# EAGLE board 32a4u (EAGLE 6.3)
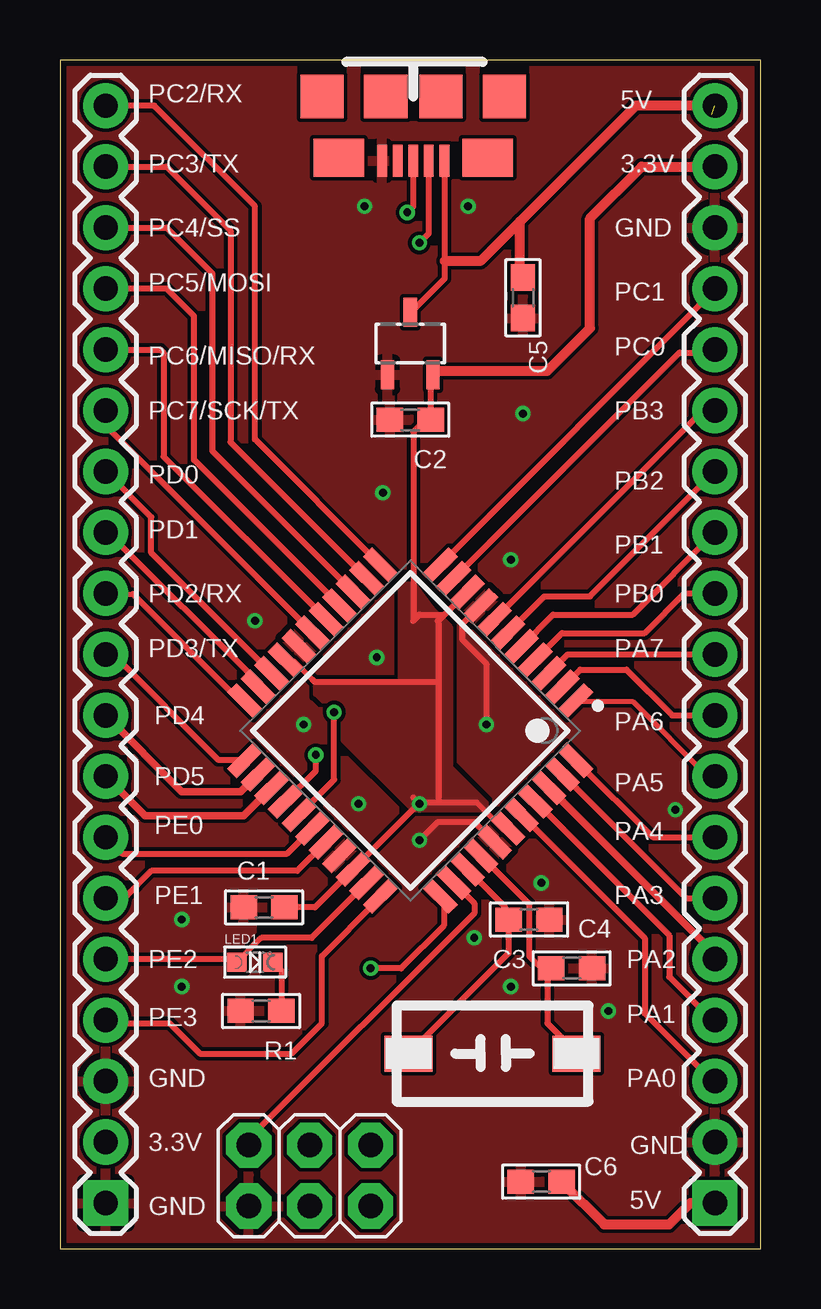
[diagram p0: board, top side]
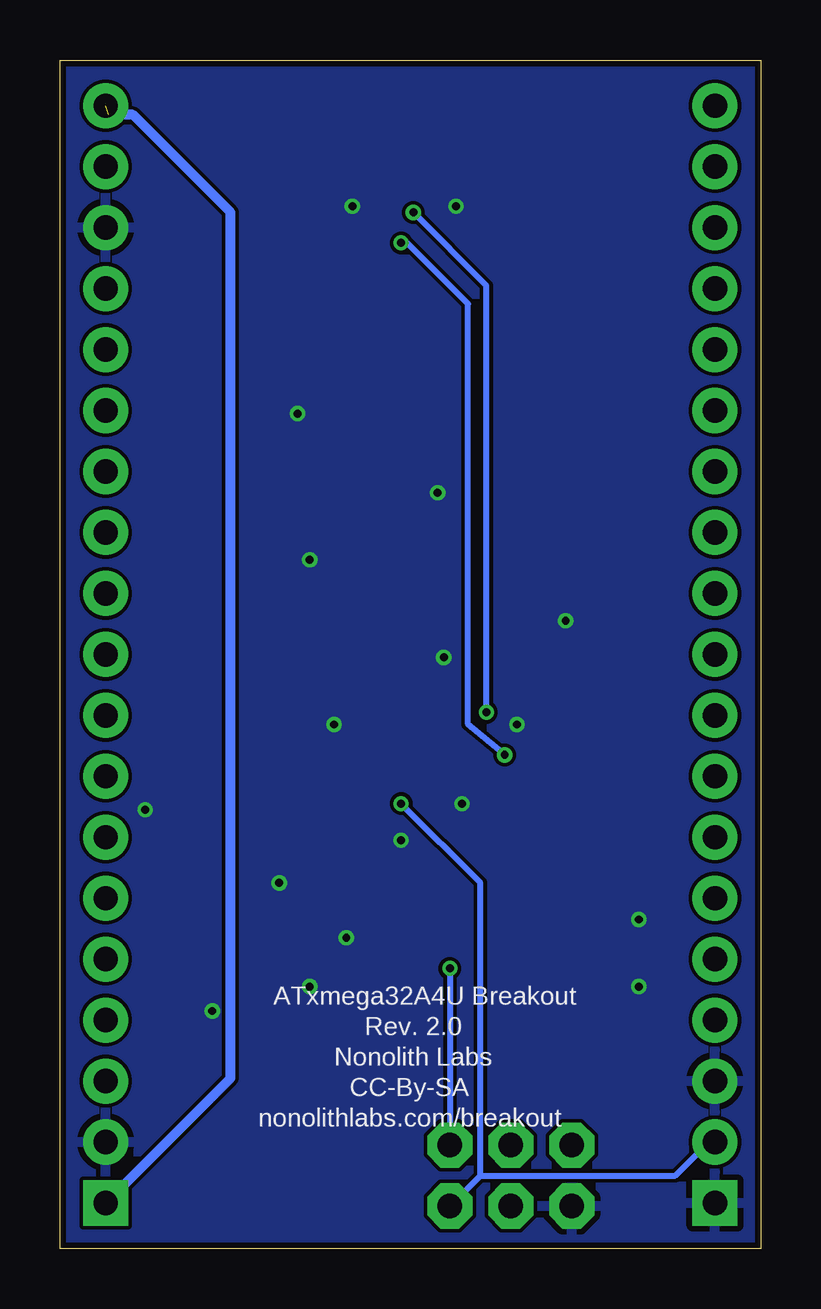
[diagram p1: board, bottom side, seen from below]

Size 29.21 x 49.53 mm. Coordinates in mm from the lower left corner, seen from the top.
Outline: 0,0 29.21,0 29.21,49.53 0,49.53 0,0
Copper layers (1*16): Top 0.035mm / dielectric 1.5mm / Bottom 0.035mm
Design rules "default": minimum track width 6mil, minimum drill 12mil, track to track 6mil, track to pad 6mil, pad to pad 6mil, via to via 6mil, smd to smd 0mil, copper to edge 10mil, drill to drill 10mil, minimum pad ring 10mil, minimum via ring 6mil, stop-mask expansion 20mil, vias tented up to drill 100mil, thermal gap 10mil
Net classes: 0 default: width 0.203 mm, clearance 0.152 mm

## Footprints (pad centres in the part's own frame; a part is rotated, then mirrored left to right if it is on the bottom)
TQFP-44 = smd 1.55 x 0.55: 1 -5.75,4; 2 -5.75,3.2; 3 -5.75,2.4; 4 -5.75,1.6; 5 -5.75,0.8; 6 -5.75,0; 7 -5.75,-0.8; 8 -5.75,-1.6; 9 -5.75,-2.4; 10 -5.75,-3.2; 11 -5.75,-4; 23 5.75,-4; 24 5.75,-3.2; 25 5.75,-2.4; 26 5.75,-1.6; 27 5.75,-0.8; 28 5.75,0; 29 5.75,0.8; 30 5.75,1.6; 31 5.75,2.4; 32 5.75,3.2; 33 5.75,4 | smd 0.55 x 1.55: 12 -4,-5.75; 13 -3.2,-5.75; 14 -2.4,-5.75; 15 -1.6,-5.75; 16 -0.8,-5.75; 17 0,-5.75; 18 0.8,-5.75; 19 1.6,-5.75; 20 2.4,-5.75; 21 3.2,-5.75; 22 4,-5.75; 34 4,5.75; 35 3.2,5.75; 36 2.4,5.75; 37 1.6,5.75; 38 0.8,5.75; 39 0,5.75; 40 -0.8,5.75; 41 -1.6,5.75; 42 -2.4,5.75; 43 -3.2,5.75; 44 -4,5.75
0603 = smd 1.1 x 1: 1 -0.85,0; 2 0.85,0
USB-MICROB = smd 0.4 x 1.35: P1 -1.3,2.675; P2 -0.65,2.675; P3 0,2.675; P4 0.65,2.675; P5 1.3,2.675 | smd 1.8 x 1.8: PAD-LB -1.15,0; PAD-LLB -3.8,0; PAD-RB 1.15,0; PAD-RRB 3.8,0 | smd 2.1 x 1.6: PAD-LT -3.1,2.55; PAD-RT 3.1,2.55
2X03 = drill 1.016 pad 1.88 octagon: 1 -2.54,-1.27; 2 -2.54,1.27; 3 0,-1.27; 4 0,1.27; 5 2.54,-1.27; 6 2.54,1.27
CHIPLED_0603 = smd 0.8 x 0.8: A 0,-0.75; C 0,0.75
SOT23-3 = smd 0.55 x 1.2: GND 0.95,1.3; VIN 0,-1.3; VOUT -0.95,1.3
1X19 = drill 1.016 pad 1.88 square: 1 0,0 | drill 1.016 pad 1.88: 2 2.54,0; 3 5.08,0; 4 7.62,0; 5 10.16,0; 6 12.7,0; 7 15.24,0; 8 17.78,0; 9 20.32,0; 10 22.86,0; 11 25.4,0; 12 27.94,0; 13 30.48,0; 14 33.02,0; 15 35.56,0; 16 38.1,0; 17 40.64,0; 18 43.18,0; 19 45.72,0
NX8045GB = smd 2 x 1.5: P$1 -3.5,0; P$2 3.5,0

## Placement (x,y rotation side)
ATXMEGA32A4U  [TQFP-44]  14.61,21.59 225 top
C1  [0603]  8.51,14.22 180 top
C2  [0603]  14.61,34.54 180 top
C3  [0603]  19.56,13.72 0 top
C4  [0603]  21.34,11.68 0 top
C5  [0603]  19.3,39.62 270 top
C6  [0603]  20.07,2.79 0 top
CN1  [USB-MICROB]  14.73,48.01 180 top
JP1  [2X03]  10.41,3.05 180 top
LED1  [CHIPLED_0603]  8.13,11.94 270 top
R1  [0603]  8.38,9.91 180 top
U$2  MCP1700  [SOT23-3]  14.61,37.72 180 top
U$3  M19  [1X19]  27.3,1.9 90 top
U$4  M19  [1X19]  1.91,1.9 90 top
Y1  [NX8045GB]  18.03,8.13 180 top

## Library data of the parts
ATXMEGA32A4U C1-C6 CN1 JP1 R1 U$2 Y1 = nonolith
LED1 = microbuilder
U$3 U$4 = SparkFun

## Nets
GND: ATXMEGA32A4U.8 ATXMEGA32A4U.18 ATXMEGA32A4U.30 ATXMEGA32A4U.38 C1.2 C2.2 C3.2 C4.2 C5.2 C6.1 CN1.P5 JP1.6 R1.2 U$2.GND U$3.2 U$3.17 U$4.1 U$4.3
N$1: LED1.C R1.1
PA0: ATXMEGA32A4U.40 U$3.3
PA1: ATXMEGA32A4U.41 U$3.4
PA2: ATXMEGA32A4U.42 U$3.5
PA3: ATXMEGA32A4U.43 U$3.6
PA4: ATXMEGA32A4U.44 U$3.7
PA5: ATXMEGA32A4U.1 U$3.8
PA6: ATXMEGA32A4U.2 U$3.9
PA7: ATXMEGA32A4U.3 U$3.10
PB0: ATXMEGA32A4U.4 U$3.11
PB1: ATXMEGA32A4U.5 U$3.12
PB2: ATXMEGA32A4U.6 U$3.13
PB3: ATXMEGA32A4U.7 U$3.14
PC0: ATXMEGA32A4U.10 U$3.15
PC1: ATXMEGA32A4U.11 U$3.16
PC2: ATXMEGA32A4U.12 U$4.19
PC3: ATXMEGA32A4U.13 U$4.18
PC4: ATXMEGA32A4U.14 U$4.17
PC5: ATXMEGA32A4U.15 U$4.16
PC6: ATXMEGA32A4U.16 U$4.15
PC7: ATXMEGA32A4U.17 U$4.14
PD0: ATXMEGA32A4U.20 U$4.13
PD1: ATXMEGA32A4U.21 U$4.12
PD2: ATXMEGA32A4U.22 U$4.11
PD3: ATXMEGA32A4U.23 U$4.10
PD4: ATXMEGA32A4U.24 U$4.9
PD5: ATXMEGA32A4U.25 U$4.8
PDI-CLK: ATXMEGA32A4U.35 JP1.5
PDI-DATA: ATXMEGA32A4U.34 JP1.1
PE0: ATXMEGA32A4U.28 U$4.7
PE1: ATXMEGA32A4U.29 U$4.6
PE2: ATXMEGA32A4U.32 LED1.A U$4.5
PE3: ATXMEGA32A4U.33 U$4.4
PR0: ATXMEGA32A4U.36 C3.1 Y1.P$2
PR1: ATXMEGA32A4U.37 C4.1 Y1.P$1
USB+: ATXMEGA32A4U.27 CN1.P3
USB-: ATXMEGA32A4U.26 CN1.P2
VCC: ATXMEGA32A4U.9 ATXMEGA32A4U.19 ATXMEGA32A4U.31 ATXMEGA32A4U.39 C1.1 C2.1 JP1.2 U$2.VOUT U$3.18 U$4.2
VUSB: C5.1 C6.2 CN1.P1 U$2.VIN U$3.1 U$3.19

## Tracks (layer width: path | path; a pad name or v marks a point on that pad's centre or on a via)
GND  (via drill 0.33)
  Top 0.254: ATXMEGA32A4U.8 16.76,26.01 16.76,25.4 17.78,24.38 v17.78,21.84 | 18.03,17.02 17.27,17.78 15.75,17.78 v14.99,17.02
  other vias: 22.86,9.91 20.07,15.24 12.45,18.54 19.3,34.8 12.7,43.43 8.13,26.16 10.16,21.84 5.08,10.92 17.02,43.43 17.27,12.95 18.8,10.92 25.65,18.29 18.8,28.7 13.21,24.64 13.46,31.5 5.08,13.72
  pour Bottom: -3.05,51.56 -3.05,-1.4 34.29,-1.4 34.29,52.2
  pour Top (rank 5): 35.94,53.47 -4.95,53.47 -4.95,-0.64 35.05,-1.91 35.05,-1.52 35.31,7.37
N$1
  Top 0.254: LED1.C 9.23,11.58 R1.1
PA0
  Top 0.203: 27.18,7.01 27.28,7.01 U$3.3 | 19.25,18.09 ATXMEGA32A4U.40
  Top 0.254: 27.18,7.01 24.38,9.8 24.38,12.94 ATXMEGA32A4U.40
PA1
  Top 0.203: 27.18,9.55 27.28,9.55 U$3.4 | ATXMEGA32A4U.41 19.81,18.64
  Top 0.254: 27.18,9.55 25.4,11.33 25.4,13.06 ATXMEGA32A4U.41
PA2
  Top 0.305: ATXMEGA32A4U.42 27.3,12.28 U$3.5
PA3
  Top 0.203: 27.28,14.63 U$3.6
  Top 0.254: ATXMEGA32A4U.43 26.12,14.61 U$3.6
PA4
  Top 0.203: ATXMEGA32A4U.44 21.54,20.32
  Top 0.254: 21.54,20.32 24.71,17.14 U$3.7
PA5
  Top 0.203: ATXMEGA32A4U.1 21.54,22.81 23.88,22.81 26.98,19.71 27.28,19.71 U$3.8
PA6
  Top 0.203: ATXMEGA32A4U.2 20.98,23.42
  Top 0.254: 20.98,23.42 21.69,24.13 23.62,24.13 25.53,22.23 U$3.9
PA7
  Top 0.254: ATXMEGA32A4U.3 21.17,24.77 U$3.10
PB0
  Top 0.254: ATXMEGA32A4U.4 20.93,25.65 24.38,25.65 26.04,27.3 U$3.11
PB1
  Top 0.254: ATXMEGA32A4U.5 20.56,26.42 23.88,26.42 U$3.12
PB2
  Top 0.254: ATXMEGA32A4U.6 20.19,27.18 22.1,27.18 U$3.13
PB3
  Top 0.254: ATXMEGA32A4U.7 26.81,34.92 U$3.14
PC0
  Top 0.254: ATXMEGA32A4U.10 25.83,37.34 27.43,37.34 U$3.15
PC1
  Top 0.254: ATXMEGA32A4U.11 27.3,39.95 U$3.16
PC2
  Top 0.254: ATXMEGA32A4U.12 8.13,33.72 8.13,43.43 3.94,47.62 U$4.19
PC3
  Top 0.254: U$4.18 4.45,45.08 7.11,42.42 7.11,33.61 ATXMEGA32A4U.13
PC4
  Top 0.254: U$4.17 4.45,42.54 6.35,40.64 6.35,33.24 ATXMEGA32A4U.14
PC5
  Top 0.254: ATXMEGA32A4U.15 5.59,32.87 5.59,38.86 4.45,40 U$4.16
PC6
  Top 0.254: U$4.15 4.19,37.46 4.32,37.34 4.32,33.01 ATXMEGA32A4U.16
PC7
  Top 0.254: ATXMEGA32A4U.17 1.91,34.29 U$4.14
PD0
  Top 0.254: ATXMEGA32A4U.20 3.81,28.99 3.81,30.48 U$4.13
PD1
  Top 0.203: 8.23,23.62 8.23,23.42 ATXMEGA32A4U.21 | 2.03,29.82 1.93,29.82 U$4.12
  Top 0.254: 2.03,29.82 8.23,23.62
PD2
  Top 0.203: 7.47,22.86 7.67,22.86 ATXMEGA32A4U.22 | 3.05,27.28 1.93,27.28 U$4.11
  Top 0.254: 3.05,27.28 7.47,22.86
PD3
  Top 0.203: 2.24,24.74 1.93,24.74 U$4.10 | 7.67,20.37 ATXMEGA32A4U.23
  Top 0.254: 7.67,20.37 6.6,20.37 2.24,24.74
PD4
  Top 0.305: ATXMEGA32A4U.24 7.54,19.05 5.08,19.05 U$4.9
PD5
  Top 0.305: U$4.8 3.56,18.03 7.66,18.03 ATXMEGA32A4U.25
PDI-CLK
  Top 0.254: ATXMEGA32A4U.35 17.27,14.4 17.27,13.97 7.87,4.57 JP1.5
PDI-DATA  (via drill 0.33)
  Top 0.254: ATXMEGA32A4U.34 16,14.54 16,13.46 14.22,11.68 v12.95,11.68
  Bottom 0.254: v12.95,11.68 JP1.1
PE0
  Top 0.203: 10.52,17.48 ATXMEGA32A4U.28
  Top 0.254: U$4.7 2.59,16.46 9.47,16.46 ATXMEGA32A4U.28
PE1
  Top 0.254: ATXMEGA32A4U.29 9.89,15.75 3.81,15.75 2.67,14.61 U$4.6
PE2
  Top 0.254: ATXMEGA32A4U.32 10.49,12.95 8.39,12.95 LED1.A 7.5,12.07 U$4.5
PE3
  Top 0.254: U$4.4 2.03,9.4 4.57,9.4 5.84,8.13 9.65,8.13 10.92,9.4 10.92,12.19 13.21,14.48 13.21,14.73 13.24,14.7 ATXMEGA32A4U.33 13.37,14.64
PR0
  Top 0.254: ATXMEGA32A4U.36 18.54,14.26 18.54,13.72 | 18.54,13.72 18.54,13.46 18.8,13.72 C3.1 | C3.1 18.71,12.3 Y1.P$2 | C3.1 18.54,13.72 | 18.54,13.72 18.8,13.97 18.8,13.8 C3.1
PR1
  Top 0.254: ATXMEGA32A4U.37 19.56,14.37 19.56,12.19 20.32,11.43 | 20.32,11.43 C4.1 | 20.32,11.43 20.32,9.4 21.59,8.13 Y1.P$1
USB+  (via drill 0.33)
  Top 0.254: ATXMEGA32A4U.27 11.43,19.55 v11.43,22.35 | v14.48,43.18 14.73,43.43 CN1.P3
  Bottom 0.254: v11.43,22.35 11.43,40.13 v14.48,43.18
USB-  (via drill 0.33)
  Top 0.254: ATXMEGA32A4U.26 10.67,19.92 v10.67,20.57 | v14.99,41.91 15.38,42.31 CN1.P2
  Bottom 0.254: v10.67,20.57 12.19,21.84 12.19,39.37 14.73,41.91 v14.99,41.91
VCC  (via drill 0.33)
  Top 0.203: 17.37,18.59 18.44,17.53 18.64,17.53 ATXMEGA32A4U.39 | 15.49,34.8 15.55,34.85 | 10.52,23.72 9.75,24.49 9.45,24.49 ATXMEGA32A4U.19
  Top 0.254: 15.8,18.59 15,18.59 ATXMEGA32A4U.31 10.63,14.22 C1.1 9.14,14.22 | 15.8,18.59 17.37,18.59 | 15.8,18.59 15.8,23.62 | 15.8,23.62 15.8,26.21 | 10.52,23.72 10.62,23.62 15.8,23.62 | ATXMEGA32A4U.9 15.78,26.16 15.75,26.16 | 15.49,34.8 15.37,34.67 | 15.37,34.67 14.73,34.04 14.73,26.16 14.99,26.42 16,26.42 17.02,27.43 | U$2.VOUT 15.46,36.32 C2.1 15.37,34.63 15.37,34.67 | 24.22,45.08 U$3.18 | v14.99,18.54 14.73,18.8
  Top 0.406: U$2.VOUT 15.71,36.58 20.32,36.58 22.1,38.35 22.1,42.93 24.26,45.08 U$3.18
  Bottom 0.254: JP1.2 11.68,3.05 | 11.68,3.05 3.56,3.05 2.16,4.45 U$4.2 | 11.68,3.05 11.68,15.24 v14.99,18.54
  pour Top: 14.73,27.69 15.49,26.67 16.26,25.91 16.26,20.07 17.78,18.54 17.53,18.29 14.73,18.29 11.68,21.34 11.68,22.1 10.67,23.11 10.67,23.62 14.22,23.62 14.22,27.69
VUSB  (1 unrouted)
  Top 0.254: CN1.P1 16.03,41.15 16.03,40.42 14.73,39.12 | 14.73,39.12 14.48,38.86 | U$2.VIN 14.7,39.12 14.73,39.12
  Top 0.406: U$3.19 24,47.62 19.18,42.8 | 19.18,42.8 17.53,41.15 16.03,41.15 | C5.1 19.18,40.6 19.18,42.8 | C6.2 22.69,1.02 25.4,1.02 26.29,1.9 U$3.1
  Bottom 0.406: U$3.1 22.1,7.11 22.1,43.18 26.16,47.24 27.18,47.24

## Text on the board
tNames: PC2/RX | 5V | PC3/TX | 3.3V | PC4/SS | GND | PC5/MOSI | PC1 | PC6/MISO/RX | PC0 | PC7/SCK/TX | PB3 | PD0 | PB2 | PD1 | PB1 | PD2/RX | PB0 | PD3/TX | PA7 | PD4 | PA6 | PD5 | PA5 | PE0 | PA4 | PE1 | PA3 | PE2 | PA2 | PE3 | PA1 | GND | PA0 | 3.3V | GND | GND | 5V
bNames: ATxmega32A4U Breakout | Rev. 2.0 | Nonolith Labs | CC-By-SA | nonolithlabs.com/breakout